# EAGLE board Wristwatch_Board_PCB_v12 (EAGLE 9.7.0)
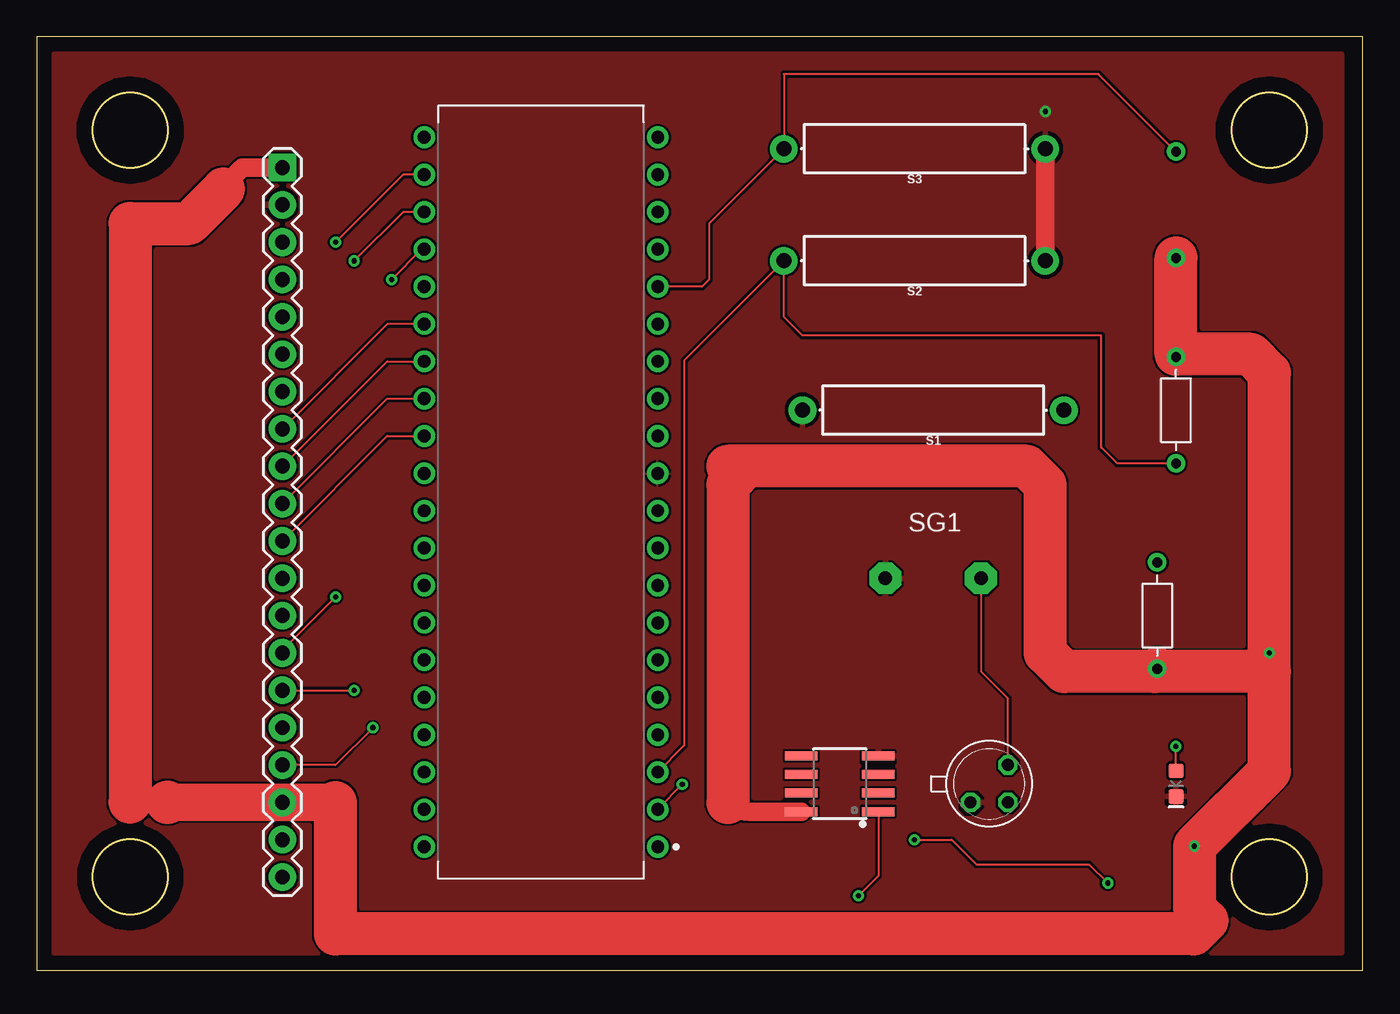
[diagram p0: board, top side]
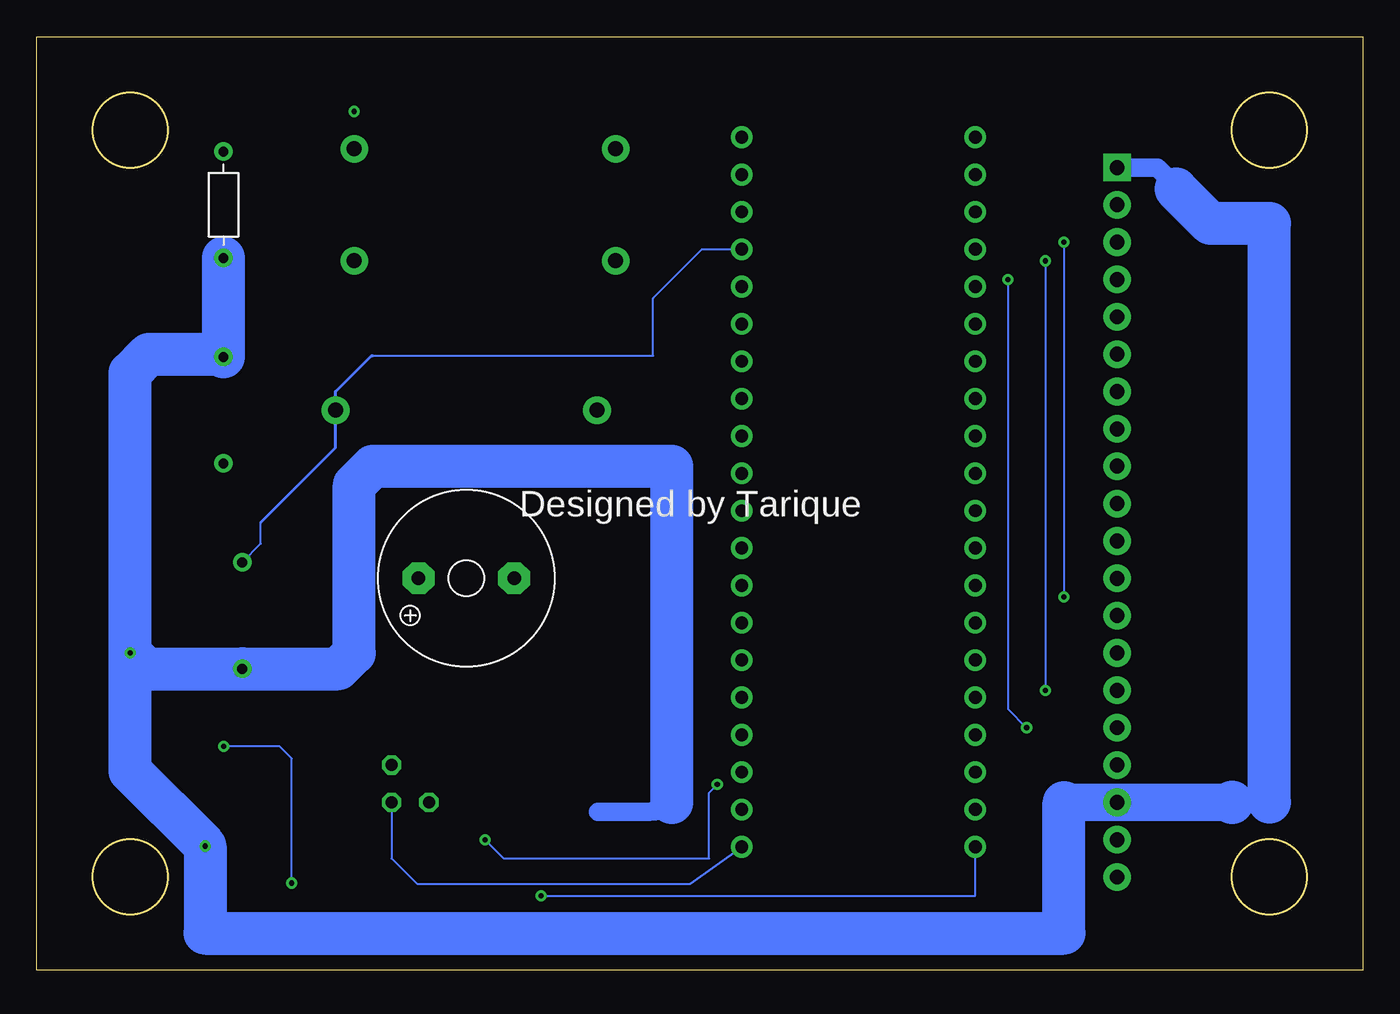
[diagram p1: board, bottom side, seen from below]

Size 90.17 x 63.5 mm. Coordinates in mm from the lower left corner, seen from the top.
Outline: 0,0 90.17,0 90.17,63.5 0,63.5 0,0
Outline: circle at 6.35,57.15 radius 2.54
Outline: circle at 6.35,6.35 radius 2.54
Outline: circle at 83.82,57.15 radius 2.54
Outline: circle at 83.82,6.35 radius 2.54
Copper layers (1*16): Top / Bottom
Stack-up Default Layer Stack: Top User Defined 0.035mm / Dielectric-1 User Defined 1.5mm / Bottom User Defined 0.035mm
Design rules "default": minimum track width 6mil, minimum drill 0.35mm, track to track 6mil, track to pad 6mil, pad to pad 6mil, via to via 6mil, smd to smd 6mil, copper to edge 40mil, drill to drill 6mil, minimum pad ring 10mil, minimum via ring 8mil, stop-mask expansion 4mil, vias tented up to drill 0mil, thermal gap 10mil

## Footprints (pad centres in the part's own frame; a part is rotated, then mirrored left to right if it is on the bottom)
LED-0603 = smd 1 x 1: A -0.877,0; C 0.877,0
DIP1587W56P254L5229H482Q40B = drill 0.877 pad 1.477: 1 -7.938,24.13; 2 -7.938,21.59; 3 -7.938,19.05; 4 -7.938,16.51; 5 -7.938,13.97; 6 -7.938,11.43; 7 -7.938,8.89; 8 -7.938,6.35; 9 -7.938,3.81; 10 -7.938,1.27; 11 -7.938,-1.27; 12 -7.938,-3.81; 13 -7.938,-6.35; 14 -7.938,-8.89; 15 -7.938,-11.43; 16 -7.938,-13.97; 17 -7.938,-16.51; 18 -7.938,-19.05; 19 -7.938,-21.59; 20 -7.938,-24.13; 21 7.938,-24.13; 22 7.938,-21.59; 23 7.938,-19.05; 24 7.938,-16.51; 25 7.938,-13.97; 26 7.938,-11.43; 27 7.938,-8.89; 28 7.938,-6.35; 29 7.938,-3.81; 30 7.938,-1.27; 31 7.938,1.27; 32 7.938,3.81; 33 7.938,6.35; 34 7.938,8.89; 35 7.938,11.43; 36 7.938,13.97; 37 7.938,16.51; 38 7.938,19.05; 39 7.938,21.59; 40 7.938,24.13
1X20 = drill 1.016 pad 1.88 square: 1 0,0 | drill 1.016 pad 1.88: 2 2.54,0; 3 5.08,0; 4 7.62,0; 5 10.16,0; 6 12.7,0; 7 15.24,0; 8 17.78,0; 9 20.32,0; 10 22.86,0; 11 25.4,0; 12 27.94,0; 13 30.48,0; 14 33.02,0; 15 35.56,0; 16 38.1,0; 17 40.64,0; 18 43.18,0; 19 45.72,0; 20 48.26,0
TO18 = drill 0.813 octagon: 1 -1.27,-1.27; 2 1.27,-1.27; 3 1.27,1.27
RESAD724W46L381D178B = drill 0.66 pad 1.26: 1 -3.62,0; 2 3.62,0
REED_SWITCH_PLASTIC = drill 1.016 pad 1.88: P$1 -8.89,0; P$2 8.89,0
F/QMBIII = drill 0.914 pad 2.159 octagon: + 3.251,0; - -3.251,0
SOIC-8 = smd 0.61 x 2.21: 1 -1.905,-2.616; 2 -0.635,-2.616; 3 0.635,-2.616; 4 1.905,-2.616; 5 1.905,2.616; 6 0.635,2.616; 7 -0.635,2.616; 8 -1.905,2.616

## Placement (x,y rotation side)
D1  Yellow  [LED-0603]  77.47,12.7 270 top
IC1  ATMEGA16  [DIP1587W56P254L5229H482Q40B]  34.29,32.54 180 top
LCD1  LCD-G12864-BARE  [1X20]  16.7,54.61 270 top
Q1  NPN  [TO18]  64.77,12.7 0 top
R2  10k  [RESAD724W46L381D178B]  77.47,38.1 90 top
R3  10k  [RESAD724W46L381D178B]  76.2,24.13 90 top
R4  10k  [RESAD724W46L381D178B]  77.47,52.07 90 bottom
S1  REED_SWITCH-PTH-INSULATED  [REED_SWITCH_PLASTIC]  60.96,38.1 180 top
S2  REED_SWITCH-PTH-INSULATED  [REED_SWITCH_PLASTIC]  59.69,48.26 180 top
S3  REED_SWITCH-PTH-INSULATED  [REED_SWITCH_PLASTIC]  59.69,55.88 180 top
SG1  F/QMBIII  [F/QMBIII]  60.96,26.67 180 bottom
U1  LM34DM  [SOIC-8]  54.61,12.7 90 top

## Library data of the parts
D1 = SparkFun-LED; PROD_ID: DIO-16514
IC1 = IC_Embedded; CATEGORY: IC_Embedded; DESCRIPTION: IC MCU 8BIT 32KB FLASH 40DIP; MANUFACTURER: Microchip Technology; MPN: ATMEGA32-16PU; OPERATING_TEMP: -40°C to 85°C; PART_STATUS: Active; SERIES: AVR® ATmega; SPEED: 16MHz; SUB-CATEGORY: Microcontroller
LCD1 = SparkFun-Displays; SF_ID: LCD-00710
Q1 = Transistor; CATEGORY: Transistor; SUB-CATEGORY: BJT; TYPE: NPN
R2-R4 = Resistor; CATEGORY: Resistor; SUB-CATEGORY: Fixed
S1-S3 = SparkFun-Switches; PROD_ID: SWCH-10467; SF_SKU: COM-10601
SG1 = buzzer; OC_FARNELL: unknown; OC_NEWARK: unknown
U1 = SparkFun-Sensors; PROD_ID: IC-08232

## Nets
5V: LCD1.1 LCD1.18 R2.2 R3.1 R4.1 U1.8
A: LCD1.19
AVCC: IC1.30
GND: IC1.11
GND1: IC1.31
K: LCD1.20
N$1: IC1.26 LCD1.8
N$2: IC1.24 LCD1.17
N$3: IC1.27 LCD1.9
N$4: IC1.28 LCD1.10
N$5: IC1.29 LCD1.11
N$7: IC1.23 LCD1.15
N$8: IC1.22 LCD1.14
N$9: IC1.40 U1.1
N$13: IC1.1 Q1.2
N$16: Q1.3 SG1.+
N$17: D1.A IC1.2
N$22: IC1.3 R2.1 S2.P$2
N$24: IC1.16 R4.2 S3.P$2
N$25: IC1.17 R3.2 S1.P$1
PE: D1.C LCD1.2 Q1.1 S1.P$2 S2.P$1 S3.P$1 SG1.- U1.4
VCC: IC1.10

## Tracks (layer width: path | path; a pad name or v marks a point on that pad's centre or on a via)
5V  (via drill 0.35)
  Top 0.152: R2.2 77.57,41.6 | 51.87,10.67 U1.8
  Top 1.27: U1.8 48.52,10.79 arc-45 46.99,11.43 | 6.35,11.44 arc45 6.38,11.43 | LCD1.1 13.97,54.61 12.84,53.48 arc45 12.7,53.15
  Top 2.54: 8.89,11.44 16.7,11.44 | 16.7,11.44 LCD1.18 | 20.32,11.43 20.32,11.44 16.7,11.44
  Top 2.921: 20.32,11.43 20.32,2.48 78.68,2.48 79.58,3.38 78.73,4.24 v78.73,8.46 83.82,13.55 83.82,20.32 | R3.1 76.01,20.32 | 76.01,20.32 69.85,20.32 68.58,21.59 68.58,33.02 67.31,34.29 48.26,34.29 | 48.26,34.29 46.99,34.29 | 48.26,34.29 46.99,33.02 46.99,11.43 | 6.35,11.44 6.35,50.8 10.35,50.8 12.7,53.15 | 83.82,20.32 76.01,20.32 | 83.82,20.32 83.82,40.64 82.55,41.91 77.47,41.91 R4.1 | 8.89,11.43 8.89,11.44
  Bottom 1.27: U1.8 48.52,10.79 arc-45 46.99,11.43 | 8.9,11.43 6.38,11.43 arc-45 6.35,11.44 | 12.7,53.15 arc-45 12.84,53.48 13.97,54.61 LCD1.1
  Bottom 2.54: 8.89,11.44 16.7,11.44 | 16.7,11.44 LCD1.18 | 20.32,11.43 20.32,11.44 16.7,11.44
  Bottom 2.921: 6.35,11.44 6.35,50.8 10.35,50.8 12.7,53.15 | 20.32,11.43 20.32,2.54 78.73,2.54 v78.73,8.46 83.82,13.55 v83.82,21.59 | v83.82,21.59 83.82,40.64 82.55,41.91 77.66,41.91 R2.2 R4.1 | v83.82,21.59 82.74,20.51 R3.1 69.66,20.51 68.58,21.59 68.58,33.02 67.31,34.29 46.99,34.29 46.99,11.43 | 8.89,11.44 8.9,11.43
GND
  pour Top: 91.44,0 0,0 0,63.5 91.44,63.5
N$1
  Top 0.152: LCD1.8 23.84,43.97 IC1.26
N$2  (via drill 0.35)
  Top 0.152: IC1.24 26.19,49.05 v24.13,46.99 | v22.86,16.51 20.32,13.97 LCD1.17
  Bottom 0.152: v24.13,46.99 24.13,17.78 v22.86,16.51
N$3
  Top 0.152: LCD1.9 23.84,41.43 IC1.27
N$4
  Top 0.152: LCD1.10 23.84,38.89 IC1.28
N$5
  Top 0.152: LCD1.11 23.84,36.35 IC1.29
N$7  (via drill 0.35)
  Top 0.152: IC1.23 24.92,51.59 v21.59,48.26 | LCD1.15 v21.59,19.05
  Bottom 0.152: v21.59,48.26 v21.59,19.05
N$8  (via drill 0.35)
  Top 0.152: IC1.22 24.92,54.13 v20.32,49.53 | v20.32,25.4 16.7,21.78 LCD1.14
  Bottom 0.152: v20.32,49.53 v20.32,25.4
N$9  (via drill 0.35)
  Top 0.152: 57.2,10.82 U1.1 57.23,6.43 v55.88,5.08
  Bottom 0.152: v55.88,5.08 26.35,5.08 IC1.40
N$13
  Bottom 0.152: Q1.2 66.04,7.62 64.31,5.89 45.75,5.89 IC1.1
N$16
  Top 0.152: SG1.+ 64.21,20.32 66.04,18.49 Q1.3
N$17  (via drill 0.35)
  Top 0.152: v43.89,12.65 42.27,11.02 IC1.2 | v72.83,5.94 71.56,7.21 63.91,7.21 62.23,8.89 v59.69,8.89 | D1.A v77.47,15.24
  Bottom 0.152: v72.83,5.94 72.83,14.41 73.66,15.24 v77.47,15.24 | v43.89,12.65 44.45,12.09 44.45,7.62 58.42,7.62 v59.69,8.89
N$22
  Top 0.152: R2.1 73.47,34.48 72.39,35.56 72.39,43.18 52.07,43.18 50.8,44.45 S2.P$2 44.03,41.49 44.03,15.29 IC1.3
N$24
  Top 0.152: R4.2 72.2,60.96 50.8,60.96 S3.P$2 45.72,50.8 45.72,46.99 45.24,46.51 IC1.16
N$25
  Bottom 0.152: 42.27,48.97 IC1.17 44.93,49.05 48.26,45.72 48.26,41.81 67.31,41.81 | R3.2 74.93,29.02 74.93,30.48
  Bottom 0.203: 74.93,30.48 69.85,35.56 S1.P$1 69.85,39.37 67.41,41.81 67.31,41.81
PE  (via drill 0.35)
  Top 1.27: S2.P$1 S3.P$1
  other vias: 68.58,58.42
  pour Top: 88.9,-1.27 -1.27,-1.27 -1.27,64.77 88.9,64.77

## Text on the board
bNames: Designed by Tarique